# Altium PCB Main_Board_PCB.PcbDoc
Units mil, origin at the board's own origin, x right, y up, seen from the top; angles counter-clockwise.
Board outline 5374.86 x 3299.86 mil, 2 copper layers (Top Layer, Bottom Layer); 65 components, 53 nets, 281 pads, 171 vias.
Unrouted connection lines stored in the file: 52.
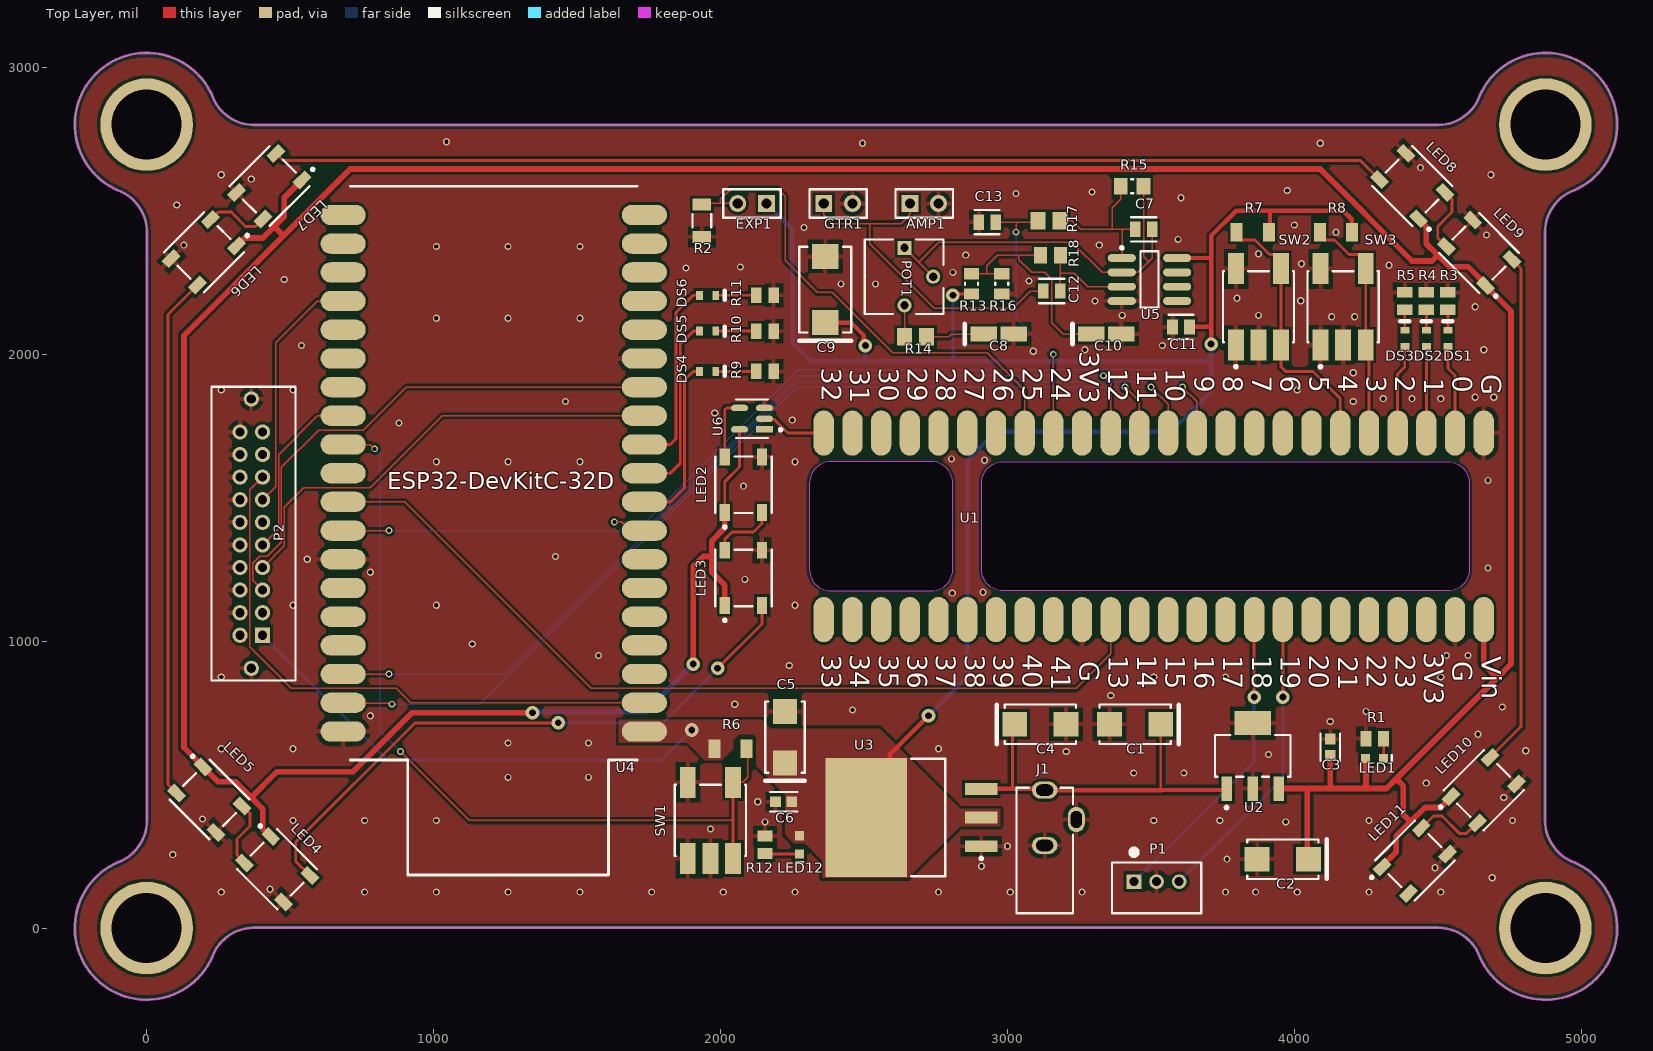
[diagram p0: Top Layer view]
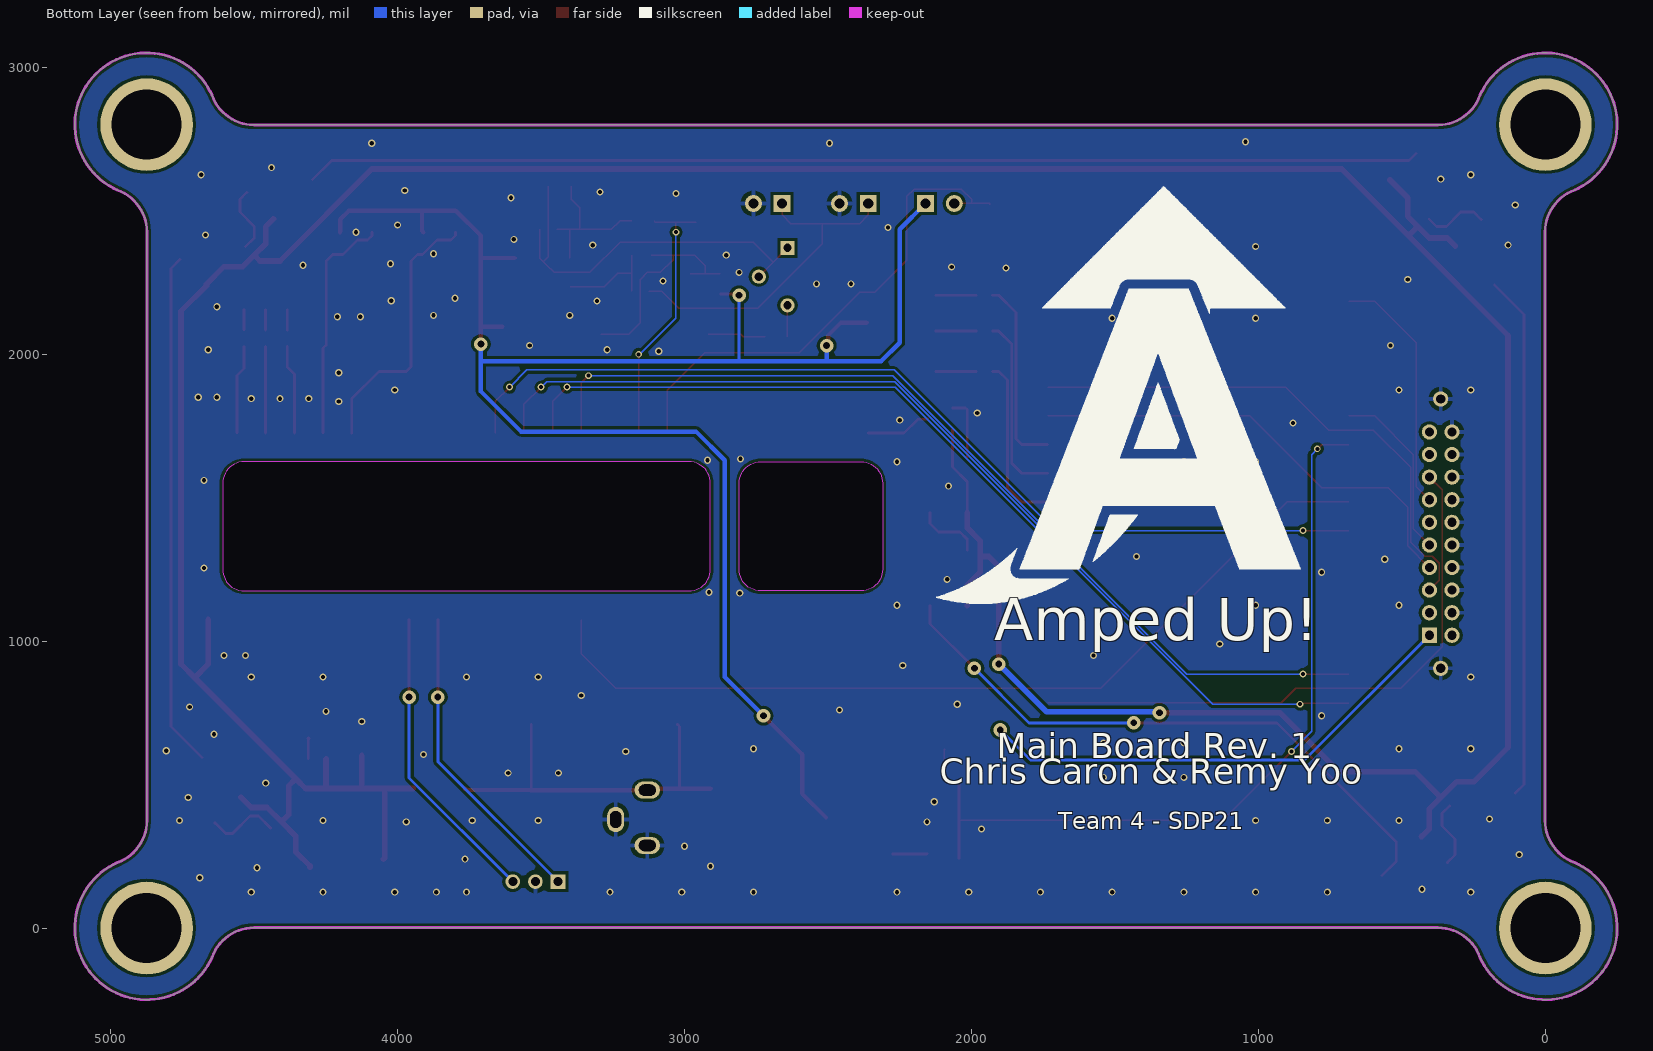
[diagram p1: Bottom Layer view, seen from below]
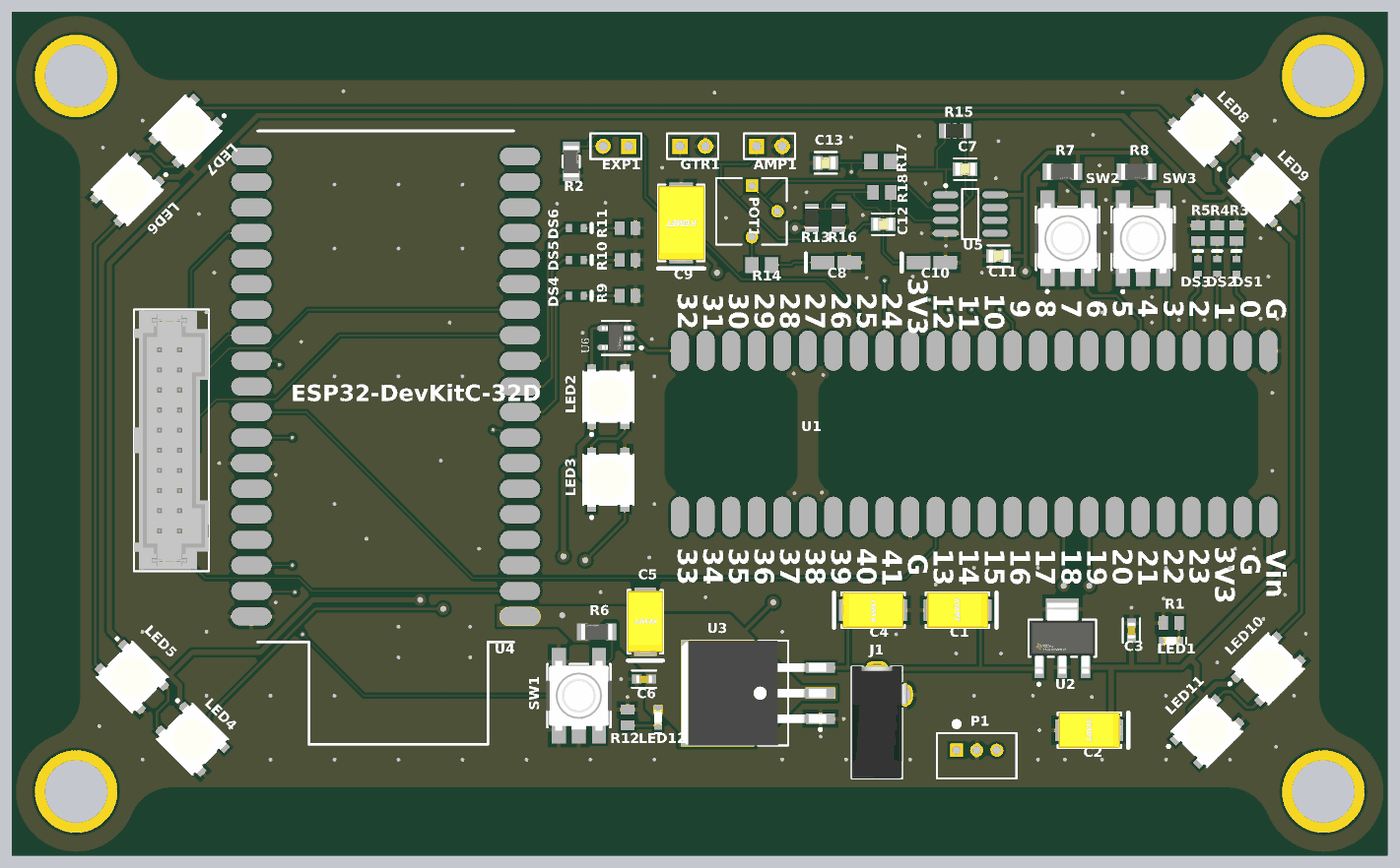
[diagram p2: 3D render of the assembled board from above, using the file's embedded part models]

## Layer stack, top to bottom
Top Solder: solder mask 0.4, Solder Resist, Dk 3.5
Top Layer: signal copper 1.4
Dielectric 1: dielectric 12.6, FR-4, Dk 4.8
Bottom Layer: signal copper 1.4
Bottom Solder: solder mask 0.4, Solder Resist, Dk 3.5

## Board outline
-101.53,228.45 ccw(c0,0) 228.45,-101.53 cw(c374.49,-154.04) 374.49,1.15 4500.51,1.15 cw(c4500.51,-154.04) 4646.55,-101.53 ccw(c4875,0) 4976.53,228.45 cw(c5029.04,374.49) 4873.85,374.49 4873.85,2425.51 cw(c5029.04,2425.51) 4976.53,2571.55 ccw(c4875,2800) 4646.55,2901.53 cw(c4500.51,2954.04) 4500.51,2798.85 374.49,2798.85 cw(c374.49,2954.04) 228.45,2901.53 ccw(c0,2800) -101.53,2571.55 cw(c-154.04,2425.51) 1.15,2425.51 1.15,374.49 cw(c-154.04,374.49)

## Design rules (kind name [scope] priority, off if disabled: settings)
Clearance [All] p1: gap=5 ignorepadtopadclearanceinfootprint=FALSE except(10: Arc-Fill Arc-Poly Arc-Region Track-Fill Track-Poly Track-Region SMDPad-Fill SMDPad-Poly SMDPad-Region THPad-Fill THPad-Poly THPad-Region Via-Fill Via-Poly Via-Region Fill-Fill Fill-Poly Fill-Region Poly-Poly Poly-Region Region-Region)
HoleSize [All] p1: absolutevalues=TRUE maxlimit=3937.01 minlimit=0.98 maxpercent=80.000 minpercent=20.000
MinimumSolderMaskSliver [All] p1: minsoldermaskwidth=7.87
PolygonConnect PolygonConnect_2 [InNet('3V3')] p1: connectstyle=Direct reliefconductorwidth=10 reliefentries=4 polygonreliefangle="90 Angle" airgapwidth=10
PolygonConnect PolygonConnect_1 [InNet('5V') OR InNet('GND')] p2: thpad.connectstyle=Relief thpad.reliefconductorwidth=15 thpad.reliefentries=4 thpad.polygonreliefangle="90 Angle" thpad.airgapwidth=15 smdpad.connectstyle=Relief smdpad.reliefconductorwidth=15 smdpad.reliefentries=4 smdpad.polygonreliefangle="90 Angle" smdpad.airgapwidth=15 via.connectstyle=Direct via.reliefconductorwidth=10 via.reliefentries=4 via.polygonreliefangle="90 Angle" via.airgapwidth=10
PolygonConnect [All] p3: connectstyle=Relief reliefconductorwidth=10 reliefentries=4 polygonreliefangle="90 Angle" airgapwidth=10
RoutingVias [All] p1: holewidth=13.78 width=23.62 viastyle="Through Hole" minholewidth=11.81 minwidth=23.62 maxholewidth=23.62 maxwidth=47.24
SilkToSolderMaskClearance [IsPad] p1: minsilkscreentomaskgap=5.91 clearancetoexposedcopper=TRUE
SolderMaskExpansion SolderMaskExpansion_1 [IsVia] p1: expansion=4 istentingtop=TRUE
SolderMaskExpansion [All] p2: expansion=1.97 istentingtop=FALSE
Width [All] p1: maxlimit=30 minlimit=5 preferedwidth=10 minimp=50.000000 maximp=50.000000 favimp=50.000000
27 further rules are at their usual default settings.

## Classes and differential pairs
component class Main_Board_Guitar_Buffer: AMP1 C7 C8 C9 C10 C11 C12 C13 GTR1 POT1 R13 R14 R15 R16 R17 R18 U5
component class Main_Board_Teensy: C1 C2 C3 LED1 P1 R1 U1 U2
component class Main_Board_IO: DS1 DS2 DS3 DS4 DS5 DS6 EXP1 J1 LED2 LED3 LED4 LED5 LED6 LED7 LED8 LED9 LED10 LED11 R2 R3 R4 R5 R6 R7 R8 R9 R10 R11 SW1 SW2 SW3 U6
component class Main_Board_ESP32: C4 C5 C6 LED12 P2 R12 U3 U4

## Components (designator, comment, footprint, x,y, rotation, side; value= is the part's Value field where it differs from the comment)
AMP1 "AMPLIFIER_INPUT" HDR1X2 2660,2525 r0 top
C1 "1uF" KEMT-T491-C_L 3445,710 r180 top
C2 "1uF" KEMT-T491-C_L 3960,240 r180 top
C3 "0.1uF" FP-GCM188-0_1-IPC_B 4125,630 r90 top
C4 "1uF" KEMT-T491-C_L 3115,710 r0 top
C5 "1uF" KEMT-T491-C_L 2225,665 r90 top
C6 "0.1uF" FP-GCM188-0_1-IPC_B 2220,440 r180 top
C7 "270pF" FP-C0805C-DN-MFG 3475,2435 r180 top value="270 pF"
C8 "10uF" KEMT-A-3216-18-2_M 2970,2070 r0 top
C9 "100 uF" KEMT-T491-D_L 2365,2225 r90 top
C10 "10uF" KEMT-A-3216-18-2_M 3345,2070 r0 top
C11 "100 nF" FP-C0805C-DN-MFG 3605,2095 r180 top value="0.10 μF"
C12 "100nF" FP-C0805C-DN-MFG 3154.53,2220 r0 top value="0.10 μF"
C13 "270pF" FP-C0805C-DN-MFG 2929.53,2460 r0 top value="270 pF"
DS1 "TLMS1000-GS08" VISH-TLMS1000_V 4535,2055 r90 top
DS2 "TLMS1000-GS08" VISH-TLMS1000_V 4460,2055 r90 top
DS3 "TLMS1000-GS08" VISH-TLMS1000_V 4385,2055 r90 top
DS4 "TLMY1000-GS08" VISH-TLMY1000_V 1955,1940 r0 top
DS5 "TLMY1000-GS08" VISH-TLMY1000_V 1955,2080 r0 top
DS6 "TLMY1000-GS08" VISH-TLMY1000_V 1955,2205 r0 top
EXP1 "EXP_SAMP" HDR1X2 2160,2525 r180 top
GTR1 "GUITAR_OUTPUT" HDR1X2 2360,2525 r0 top
J1 "694103303002" 694103303002 3130,270 r0 top
LED1 "Green" 0603_A 4280,590 r180 top
LED2 "1655" ADA-RGB-1655_V 2080,1545 r90 top
LED3 "1655" ADA-RGB-1655_V 2080,1220 r90 top
LED4 "1655" ADA-RGB-1655_V 455,205 r315 top
LED5 "1655" ADA-RGB-1655_V 219.14,447.73 r315 top
LED6 "1655" ADA-RGB-1655_V 200,2355 r225 top
LED7 "1655" ADA-RGB-1655_V 428.28,2585.36 r225 top
LED8 "1655" ADA-RGB-1655_V 4410.69,2586.02 r135 top
LED9 "1655" ADA-RGB-1655_V 4644.04,2352.68 r135 top
LED10 "1655" ADA-RGB-1655_V 4660,480 r45 top
LED11 "1655" ADA-RGB-1655_V 4420,235 r45 top
LED12 "Green" 0603_A 2275,290 r90 top
P1 "B3B-PH-K-S(LF)(SN)" JST-B3B-PH-K-S-3_V 3520,140 r0 top
P2 "T2M-110-01-L-D-TH-WT" SMTC-T2M-110-01-X-D-TH-WT 404.37,1020.16 r90 top
POT1 "100K" BOUR-3362P 2640,2270 r270 top
R1 "90" RESC2013X50X40LL20T20 4280,660 r0 top
R2 "10K" FP-CR1206-IPC_B 1935,2465 r90 top
R3 "750" RESC2013X50X40LL20T20 4535,2185 r270 top
R4 "750" RESC2013X50X40LL20T20 4460,2185 r270 top
R5 "750" RESC2013X50X40LL20T20 4385,2185 r270 top
R6 "10K" FP-CR1206-IPC_B 2035,625 r180 top
R7 "10K" FP-CR1206-IPC_B 3855,2425 r0 top
R8 "10K" FP-CR1206-IPC_B 4145,2425 r0 top
R9 "RR1220P-331-D" RESC2013X50X40LL20T20 2155,1940 r180 top
R10 "RR1220P-331-D" RESC2013X50X40LL20T20 2155,2080 r180 top
R11 "RR1220P-331-D" RESC2013X50X40LL20T20 2155,2205 r180 top
R12 "90" RESC2013X50X40LL20T20 2155,290 r270 top
R13 "10K" RESC2013X60X35NL10T20 2875,2245 r270 top
R14 "470" RESC2013X70X40ML20T20 2680,2060 r180 top
R15 "100K" RESC2013X60X35ML10T20 3435,2585 r180 top
R16 "10K" RESC2013X60X35NL10T20 2980,2245 r90 top
R17 "470" RESC2013X70X40ML20T20 3145,2465 r180 top
R18 "1M" RESC2013X70X40NL20T20 3150,2345 r0 top
SW1 "Momentary" FP-B3SN-3112P-MFG 1965,375 r270 top
SW2 "Momentary" FP-B3SN-3112P-MFG 3875,2165 r270 top
SW3 "Momentary" FP-B3SN-3112P-MFG 4170,2165 r270 top
U1 "Teensy 4.1 Socket" "Teensy 4.1 Socket" 4660,1700 r180 top locked
U2 "LM7805MPX/NOPB" FP-LM7805MPX-NOPB-MFG 3855,600 r90 top
U3 "3.3V Reg" KTT0003B_N 2665,385 r180 top
U4 "ESP32-DevKitC-32D" ESP32-DevKitC-32D 710,2485 r270 top locked
U5 "MCP6002" SOIC-SN8_M 3495,2260 r0 top locked
U6 "SN74LV1T34DBVR" FP-DBV0005A-IPC_B 2110,1775 r180 top

## Footprints (in the part's own frame and the unit in brackets; to place one, negate y for a bottom-side part, rotate by r counter-clockwise, add the part's x,y. Pads: shape width x height; smd on the part's side, far side on the other; paste and mask are expansions set on the pad)
0603_A [mm] "Chip LED, 2-Leads, Body 1.6x0.8mm, IPC Medium Density"
  rect 0.8x0.8 smd: 1(-0.8,0) 2(0.8,0)
  silkscreen extent -1.5,-0.3 -1.5,0.3, body extent -0.8,-0.4 0.8,0.4, height 0.7
694103303002 [mm] "DC Power Jack Right Angled(4.2)"
  oval 2.25x1.5 hole 1 slot 1.5 at 0 deg: 1(0,5.35) 2(0,0.45)
  oval 1.5x2.25 hole 1 slot 1.5 at 90 deg: 3(2.8,2.75)
  silkscreen extent -2.5,-5.55 2.5,5.55, body extent -2.5,-5.55 3,5.75, height 7.8
ADA-RGB-1655_V [mm] "SMD, 4-Leads, Body 5x5mm"
  rect 1.5x0.9 smd: 1(-2.45,1.65) 2(-2.45,-1.65) 3(2.45,-1.65) 4(2.45,1.65)
  silkscreen extent -3.87,-2.5 2.5,2.5, body extent -2.7,-2.5 2.7,2.5, height 1.68
BOUR-3362P [mm] "THD, 3-Leads, Body 6.6x6.99mm, Pitch 2.54mm"
  rect 1.25x1.25 hole 0.75: 1(-2.54,0.035)
  round 1.25 hole 0.75: 2(0,2.575) 3(2.54,0.035)
  silkscreen extent -3.3,-3.49 3.3,3.5, body extent -3.3,-3.49 3.3,3.49, height 4.95
ESP32-DevKitC-32D [mm]
  rrect100% 1.8x4 smd: 0(12.7,-0.635) 2(10.16,-0.635) 3V3(45.72,26.035) 4(15.24,-0.635) 5(22.86,-0.635) 5V(0,26.035) 12(15.24,26.035) 13(10.16,26.035) 14(17.78,26.035) 15(7.62,-0.635) 16(17.78,-0.635) 17(20.32,-0.635) 18(25.4,-0.635) 19(27.94,-0.635) 21(33.02,-0.635) 22(40.64,-0.635) 23(43.18,-0.635) 25(25.4,26.035) 26(22.86,26.035) 27(20.32,26.035) 32(30.48,26.035) 33(27.94,26.035) 34(35.56,26.035) 35(33.02,26.035) CLK(0,-0.635) CMD(2.54,26.035) D0(2.54,-0.635) D1(5.08,-0.635) D2(7.62,26.035) D3(5.08,26.035) EN(43.18,26.035) GND-1(30.48,-0.635) GND-2(45.72,-0.635) GND-3(12.7,26.035) RX(35.56,-0.635) TX(38.1,-0.635) VN(38.1,26.035) VP(40.64,26.035)
  silkscreen extent -2.54,0 58.42,25.4
FP-B3SN-3112P-MFG [mm]
  rect 2.75x1.4 smd paste+0 mask+0: 1(3.375,-2) 2(-3.375,-2) 3(3.375,2) 4(-3.375,2) 5(3.375,0)
  silkscreen extent -3.15,-3.15 3.15,3.15, body extent -4.85,-3.25 4.85,3.25, height 0.25
FP-C0805C-DN-MFG [mm]
  rect 0.95x1.35 smd paste+0 mask+0: 1(-0.75,0) 2(0.75,0)
  silkscreen extent -1.1,-1.07 1.1,1.07, body extent -1.4,-0.85 1.4,0.85, height 0.25
FP-CR1206-IPC_B [mil]
  rect 41.66x65.44 smd paste+0 mask+0: 1(-56.18,0) 2(56.18,0)
  silkscreen extent -24,-33 24,33, body extent -87,-43 87,43, height 10
FP-DBV0005A-IPC_B [mm]
  rect 1.505x0.572 smd paste+0 mask+0: 1(-1.1,0.95)
  rrect100% 1.505x0.572 smd paste+0 mask+0: 2(-1.1,0) 3(-1.1,-0.95) 4(1.1,-0.95) 5(1.1,0.95)
  silkscreen extent -2.65,-1.7 1.4,1.7, body extent -2.1,-1.7 2.1,1.7, height 0.25
FP-GCM188-0_1-IPC_B [mil]
  rect 37.74x35.91 smd paste+0 mask+0: 1(-28.61,0) 2(28.61,0)
  silkscreen extent -47,-34 47,34, body extent -57,-28 57,28, height 10
FP-LM7805MPX-NOPB-MFG [mm]
  rect 2.15x0.95 smd paste+0 mask+0: 1(-2.9,2.3) 2(-2.9,0) 3(-2.9,-2.3)
  rect 2.15x3.25 smd paste+0 mask+0: 4(2.9,0)
  silkscreen extent -4.7,-3.35 1.85,3.35, body extent -4.08,-3.45 4.08,3.45, height 0.25
HDR1X2 [mm] "Connector; Header; 2 Position"
  rect 1.5x1.5 hole 0.9: 1(0,0)
  round 1.5 hole 0.9: 2(2.54,0)
  silkscreen extent -1.27,-1.27 3.81,1.27
JST-B3B-PH-K-S-3_V [mm] "Connector, 3-Leads, Body 7.9x4.5mm, Pitch 2mm"
  rect 1.3x1.3 hole 0.8: 1(-2,0.55)
  round 1.3 hole 0.8: 2(0,0.55) 3(2,0.55)
  silkscreen extent -3.95,-2.25 3.95,3.4, body extent -3.95,-2.25 3.95,2.25, height 6
KEMT-A-3216-18-2_M [mm] "Molded TAN Capacitor, 2-Leads, Body 3.4x1.8mm, IPC Low Density"
  rect 2.35x1.35 smd: 1(-1.325,0) 2(1.325,0)
  silkscreen extent -3,-0.9 -3,0.9, body extent -1.7,-0.9 1.7,0.9, height 1.8
KEMT-T491-C_L [mm] "Molded Capacitor, 2-Leads, Body 6.30x3.50mm, IPC High Density"
  rect 2.2x2.15 smd: 1(-2.275,0) 2(2.275,0)
  silkscreen extent -3.87,-1.75 3.15,1.75, body extent -3.15,-1.75 3.15,1.75, height 2.79
KEMT-T491-D_L [mm] "Molded Capacitor, 2-Leads, Body 7.60x4.60mm, IPC High Density"
  rect 2.2x2.35 smd: 1(-2.925,0) 2(2.925,0)
  silkscreen extent -4.52,-2.3 3.8,2.3, body extent -3.8,-2.3 3.8,2.3, height 3.1
KTT0003B_N [mm] "D2-PAK, 3-Leads, Body 10.41x8.89mm, Pitch 2.54mm, IPC Medium Density"
  rect 2.85x1.05 smd: 1(-6.2,2.54) 2(-6.2,0) 3(-6.2,-2.54)
  rect 7.2x10.5 smd: 4(4,0)
  silkscreen extent -6.33,-5.2 0,5.2, body extent -6.78,-5.2 7.57,5.2, height 4.64
RESC2013X50X40LL20T20 [mm] "Chip Resistor, 2-Leads, Body 2.00x1.25mm, IPC High Density"
  rect 0.95x1.35 smd: 1(-0.775,0) 2(0.775,0)
  body extent -1.1,-0.72 1.1,0.73, height 0.5
RESC2013X60X35ML10T20 [mm] "Chip Resistor, 2-Leads, Body 2.1x1.35mm, IPC Low Density"
  rect 1.2x1.45 smd: 1(-1,0) 2(1,0)
  silkscreen extent -0.1,-0.63 0.1,0.63, body extent -1.05,-0.68 1.05,0.67, height 0.6
RESC2013X60X35NL10T20 [mm] "Chip Resistor, 2-Leads, Body 2.1x1.35mm, IPC Medium Density"
  rect 1x1.35 smd: 1(-0.9,0) 2(0.9,0)
  silkscreen extent -0.1,-0.58 0.1,0.58, body extent -1.05,-0.68 1.05,0.67, height 0.6
RESC2013X70X40ML20T20 [mm] "Chip Resistor, 2-Leads, Body 2.00x1.25mm, IPC Low Density"
  rect 1.35x1.55 smd: 1(-0.975,0) 2(0.975,0)
  body extent -1.1,-0.72 1.1,0.72, height 0.7
RESC2013X70X40NL20T20 [mm] "Chip Resistor, 2-Leads, Body 2.2x1.35mm, IPC Medium Density"
  rect 1.15x1.45 smd: 1(-0.875,0) 2(0.875,0)
  body extent -1.1,-0.72 1.1,0.72, height 0.7
SMTC-T2M-110-01-X-D-TH-WT [mm] "Shrouded Terminal Strip, 2x10 Pins, Vertical, 2mm Pitch, Male"
  rect 1.35x1.35 hole 0.813: 1(0,0)
  round 1.35 hole 0.813: 2(0,2) 3(2,0) 4(2,2) 5(4,0) 6(4,2) 7(6,0) 8(6,2) 9(8,0) 10(8,2) 11(10,0) 12(10,2) 13(12,0) 14(12,2) 15(14,0) 16(14,2) 17(16,0) 18(16,2) 19(18,0) 20(18,2) MH1(-2.925,1) MH2(20.925,1)
  silkscreen extent -4,-2.92 22,4.52, body extent -3.84,-2.91 21.84,4.52, height 5.79
SOIC-SN8_M [mm] "SOIC, 8-Leads, Body 4.9x3.9mm, Pitch 1.27mm, IPC Low Density"
  oval 2.5x0.7 smd: 1(-2.45,1.905) 2(-2.45,0.635) 3(-2.45,-0.635) 4(-2.45,-1.905) 5(2.45,-1.905) 6(2.45,-0.635) 7(2.45,0.635) 8(2.45,1.905)
  silkscreen extent -2.57,-2.5 0.8,2.93, body extent -2,-2.5 2,2.5, height 1.75
"Teensy 4.1 Socket" [mm]
  rrect100% 1.8x4 smd: 0(2.54,-0.635) 1(5.08,-0.635) 2(7.62,-0.635) 3(10.16,-0.635) 3.3-1(35.56,-0.635) 3.3-2(5.08,15.875) 4(12.7,-0.635) 5(15.24,-0.635) 6(17.78,-0.635) 7(20.32,-0.635) 8(22.86,-0.635) 9(25.4,-0.635) 10(27.94,-0.635) 11(30.48,-0.635) 12(33.02,-0.635) 13(33.02,15.875) 14(30.48,15.875) 15(27.94,15.875) 16(25.4,15.875) 17(22.86,15.875) 18(20.32,15.875) 19(17.78,15.875) 20(15.24,15.875) 21(12.7,15.875) 22(10.16,15.875) 23(7.62,15.875) 24(38.1,-0.635) 25(40.64,-0.635) 26(43.18,-0.635) 27(45.72,-0.635) 28(48.26,-0.635) 29(50.8,-0.635) 30(53.34,-0.635) 31(55.88,-0.635) 32(58.42,-0.635) 33(58.42,15.875) 34(55.88,15.875) 35(53.34,15.875) 36(50.8,15.875) 37(48.26,15.875) 38(45.72,15.875) 39(43.18,15.875) 40(40.64,15.875) 41(38.1,15.875) GND1(0,-0.635) GND2(35.56,15.875) GND3(2.54,15.875) Vin(0,15.875)
  Keep-Out Layer board cut-out: 1.27,3.81 1.27,11.43 1.415,12.159 1.828,12.777 2.446,13.19 3.175,13.335 3.175,13.335 42.545,13.335 43.274,13.19 43.892,12.777 44.305,12.159 44.45,11.43 44.45,11.43 44.45,3.81 44.305,3.081 43.892,2.463 43.274,2.05 42.545,1.905 42.545,1.905 3.175,1.905 2.222,2.16 1.525,2.857 1.27,3.81
  Keep-Out Layer board cut-out: 46.99,3.81 47.135,3.081 47.548,2.463 48.166,2.05 48.895,1.905 48.895,1.905 57.785,1.905 58.514,2.05 59.132,2.463 59.545,3.081 59.69,3.81 59.69,3.81 59.69,11.43 59.545,12.159 59.132,12.777 58.514,13.19 57.785,13.335 57.785,13.335 48.895,13.335 48.166,13.19 47.548,12.777 47.135,12.159 46.99,11.43 46.99,11.43
VISH-TLMS1000_V [mm] "SMD, 2-Leads, Body 0.8x1.6mm"
  rect 0.6x0.8 smd: 1(-0.725,0) 2(0.725,0)
  silkscreen extent 1.52,-0.4 1.52,0.4, body extent -0.8,-0.4 0.8,0.4, height 0.65
VISH-TLMY1000_V [mm] "SMD, 2-Leads, Body 1.6x0.8mm"
  rect 0.6x0.8 smd: 1(-0.725,0) 2(0.725,0)
  silkscreen extent 1.53,-0.4 1.53,0.4, body extent -0.8,-0.4 0.8,0.4, height 0.65

## Part data
AMP1 EXP1 GTR1: library part "Header 2", "Header, 2-Pin", LatestRevisionDate=17-Jul-2002, LatestRevisionNote="Re-released for DXP Platform.", Publisher="Altium Limited"
C1 C2 C4 C5: library part CMP-2000-07195-1, "Tantalum Capacitor, 1 uF, +/- 10%, 50 V, -55 to 125 degC, 2-Pin SMD, RoHS, Tape and Reel", Capacitance=1000000pF, Case Code=C, Case Style=Molded, Manufacturer=Kemet, Operating Temp Range=-55Cto125C, Package / Case=6032-28, Package Description="2-Pin Surface Mount Device, Body 6 x 3.2 mm", Package Reference=T491-C, Tolerance (+ or -)=10%, Voltage=50VDC, Construction=SMTChip, Datasheet URL=http://capacitoredge.kemet.com/capedge2/DataSheet/Datasheet-T491C105K050AT.pdf?pn=T491C105K050AT, Datasheet Version=10/2016, DCL=0.5uA, DF=4%, ESR=5.5ohm, Failure Rate=NotRequired, Insulation=NotRequired, Lead Spacing (nom)=NotRequiredmm, Length W/Weld=NotRequiredmm, Length W/Weld (max)=NotRequiredmm, Manufacturer URL=http://www.kemet.com/, Mounting Style=SurfaceMount, Mounting Technology=SurfaceMount, Packaging=TapeandReel, Polarity=Polar, Product Depth (mm)=3.2mm, Product Diameter (mm)=NotRequiredmm, Product Height (mm)=2.5mm, Product Length (mm)=6mm, Rad Hardened=No, Seal=NotRequired, Seated Plane Height=NotRequiredmm, Wire Form=NotRequired
C3 C6: library part CMP-2006-02353-3, "Ceramic Capacitor for Automotive 100nF  ±10% 50VDC X8L 0603 Paper T/R", Capacitance=100nF, Case Code (Imperial)=0603, Case Code (Metric)=1608, Dielectric=X8L, Max Operating Temperature=150°C, Min Operating Temperature=-55°C, Package Quantity=4000, Ratings=AEC-Q200, Tolerance=10%, Voltage=50V, Case/Package=0603, Depth=0.8mm, Height=0.8mm, Lead Free="Lead Free", Length=1.6mm, Mount="Surface Mount", Packaging="Tape and Reel", Radiation Hardening=No, Termination=SMD/SMT, Thickness=0.035inch, Voltage Rating=50V, Voltage Rating (DC)=50V, Width=0.5mm
C7 C13: library part CMP-1036-02406-3, "CAP CER 270PF 50V C0G/NP0 0805", Capacitance="270 pF", Manufacturer=KEMET, Manufacturer Part Number=C0805C271J5GACTU, Package=C0805C-DN, Temperature="-55°C to +125°C", Temperature Characteristic=C0G, Temperature Coefficient=30ppm/°C, Temperature Range High=+125°C, Temperature Range Low=-55°C, Tolerance=0.05, Voltage Rating="50 V", Automotive=No, Category=Cap, ComponentLink2Description=Datasheet, ComponentLink2URL=https://content.kemet.com/datasheets/KEM_C1003_C0G_SMD.pdf, Device Class L1="Passive Components", Device Class L2=Capacitors, Device Class L3="Ceramic Capacitors", Digikey Description="CAP CER 270PF 50V C0G/NP0 0805", Height=0.88mm, Ipc Land Pattern Name=CAPC200125X78, Lead Free=Yes, Material=Ceramic, Mouser Description="Multilayer Ceramic Capacitors MLCC - SMD/SMT 50volts 270pF C0G 5%", Octopart=https://octopart.com/c0805c271j5gactu-kemet-104903, RoHS=TRUE
C8 C10: library part CMP-2000-05172-1, "Capacitor, Tantalum, 10 uF, +/- 10%, 10 V, -55 to 125 degC, 2-Pin SMD (1206), RoHS, Tape and Reel", Capacitance=10µF, ESR (Equivalent Series Resistance)=3.8Ohm, Lifetime @ Temp.=2000Hrs@85degC, Manufacturer=Kemet, Manufacturer Size Code=A, Operating Temperature=-55degC~125degC, Package / Case=1206(3216Metric), Package Description="2-Pin Surface Mount Device, Body 3.2 x 1.6 mm", Package Reference=1206, Standard Package=2,000, Tolerance=±10%, Voltage - Rated=10V, Catalog Drawings=T49x,T5xxSeries_A-side1T49x,T5xxSeries_A,B-side2T49x,T5xxSeries_A,SBottom, Category=Capacitors, Datasheet URL=http://www.farnell.com/datasheets/1824869.pdf, Datasheet Version=Apr-14, Family=TantalumCapacitors, Features=GeneralPurpose, Height - Seated (Max)="0.071\"(1.80mm)", Lead Spacing=-, Manufacturer URL=http://www.kemet.com/, Mounting Type=SurfaceMount, Online Catalog=T491Series, Other Names=399-3684-2, Packaging=Tape&Reel(TR), Product Training Modules=CapacitorBasics-TypicalUsesforCapacitorsDeratingGuidelinesforSurfaceMountTantalumCapacitors, Series=T491, Size / Dimension="0.126\"Lx0.063\"W(3.20mmx1.60mm)", Type=Molded
C9: library part CMP-2000-07541-1, "Tantalum Surface Mount Capacitor, 100 uF, +/- 10%, 16 V, -55 to 125 degC, 2917 (7343 Metric), RoHS, Tape and Reel", Capacitance=100uF, Case Code (Imperial)=2917, Case Code (Metric)=7343, Case\/Package=Molded, Dielectric Material=Tantalum, ESR (Equivalent Series Resistance)=700mOhm, Leakage Current=16uA, Manufacturer=Kemet, Max Operating Temperature=125degC, Min Operating Temperature=-55degC, Package Description="2-Pin Surface Mount Device, Body 7.3 x 4.3 mm", Package Quantity=1, Package Reference=T491-D, Ripple Current=463mA, Tolerance=10%, Voltage=16V, Datasheet URL=http://www.kemet.com/Lists/ProductCatalog/Attachments/254/KEM_T2005_T491.pdf, Datasheet Version=07/2017, Depth=4.3mm, Dissipation Factor=8%, Height=2.8mm, Height - Seated (Max)=0.122inch, Lead Free=LeadFree, Lead Pitch=3.6mm, Length=7.3mm, Life (Hours)=2000Hour, Manufacturer URL=http://www.kemet.com/, Mount=PCB, Mounting Technology=SurfaceMount, Packaging=TapeandReel, Polarity=Polar, Radiation Hardening=No, REACH SVHC=NoSVHC, RoHSCompliant=true, Termination=SMD/SMT, Voltage Rating=16V, Voltage Rating (DC)=16V, Weight=0.023634oz, Width=4.3mm
C11 C12: library part CMP-2007-00279-2, "CAP CER 0.1UF 50V X7R 0805", Capacitance="0.10 μF", Manufacturer=KEMET, Manufacturer Part Number=C0805C104K5RACTU, Package=C0805C-DN, Temperature="-55°C to +125°C", Temperature Characteristic=X7R, Temperature Coefficient=30ppm/°C, Temperature Range High=+125°C, Temperature Range Low=-55°C, Tolerance=0.1, Voltage Rating="50 V", Automotive=No, Category=Cap, ComponentLink2Description=Datasheet, ComponentLink2URL=https://content.kemet.com/datasheets/KEM_C1003_C0G_SMD.pdf, Device Class L1="Passive Components", Device Class L2=Capacitors, Device Class L3="Ceramic Capacitors", Digikey Description="CAP CER 0.1UF 50V X7R 0805", Height=0.88mm, Ipc Land Pattern Name=CAPC200125X78, Lead Free=Yes, Material=Ceramic, Mouser Description="Cap Ceramic 0.1uF 50V X7R 10% SMD 2.0 x 1.2 mm 125 C Paper T/R", Octopart=https://octopart.com/c0805c104k5ractu-kemet-143926, RoHS=TRUE
DS1 DS2 DS3: library part CMP-2000-07254-1, "Low Current LED, 40 mW, 1.8 V, -40 to 100 degC, 2-Pin SMD (0603), RoHS, Tape and Reel", Forward Current If=2mA, Forward Voltage=1.8V, LED Colour=Red, Manufacturer=Vishay, Package Description="2-Pin Surface Mount Device, Body 1.6 x 0.8 mm", Package Reference=TLMS1000, Automotive Qualification Standard=AEC-Q100, Bulb Size=1.6mmx0.8mm, Datasheet URL=https://datasheet.ciiva.com/5798/1698881-5798337.pdf, Datasheet Version="Rev. 1.7, 02/2011", LED Mounting=SMD, Lens Shape=Rectangular, Luminous Intensity=4mcd, Manufacturer URL=http://www.vishay.com/, Mounting Technology=SurfaceMount, MSL=MSL2-1year, Packaging=CutTape, Product Range=-, SVHC=ToBeAdvised, Viewing Angle=80°, Wavelength Typ=636nm
DS4 DS5 DS6: library part CMP-2000-07255-1, "Low Current LED, 40 mW, -40 to 100 degC, 2-Pin SMD, RoHS, Tape and Reel", Forward Current If=2mA, Forward Voltage=1.8V, LED Colour=Yellow, Manufacturer=Vishay, Package Description="2-Pin Surface Mount Device, Body 1.6 x 0.8 mm", Package Reference=TLMY1000, Automotive Qualification Standard=AEC-Q100, Bulb Size=1.6mmx0.8mm, Datasheet URL=http://www.vishay.com/docs/83172/tlmo1000.pdf, Datasheet Version="Rev. 2.0, 09/2013", LED Mounting=SMD, Lens Shape=Rectangular, Luminous Intensity=7.5mcd, Manufacturer URL=http://www.vishay.com/, Mounting Technology=SurfaceMount, MSL=MSL2-1year, Packaging=CutTape, Product Range=-, SVHC=ToBeAdvised, Viewing Angle=80°, Wavelength Typ=595nm
J1: library part CMP-1502-00185-1, "DC Power Jack Connector WR-DC, Male, Right Angled, THT, 2 A, 30 V", Manufacturer="Wurth Elektronik", Operating Temperature=-40to85degC, Rated Current=2A, Working Voltage=30V, Datasheet URL=http://katalog.we-online.de/em/datasheet/6941xx303002.pdf, Gender=Male, Manufacturer URL=http://www.we-online.de, Mounting Technology=THT, Opening Diameter=4.2mm, Orientation=RightAngled, Package Reference=694103303002, Packaging=Bag, Part Number=694103303002, Plug Inner Diameter=1.35mm, Plug Outer Diameter=3.5mm, Publisher=WurthElektronik
LED1 LED12: library part CMP-1426-00002-1, "SMD mono-color Chip LED, WL-SMCW, Green", Manufacturer="Wuerth Elektronik", PartNumber=150060GS75000, Color=Green, ComponentLink1Description="Manufacturer URL", ComponentLink1URL=http://www.we-online.com, ComponentLink2Description=Datasheet, ComponentLink2URL=http://katalog.we-online.com/led/datasheet/150060GS75000.pdf, PackageReference=0603_A
LED2 LED3 LED4 LED5 LED6 LED7 LED8 LED9 LED10 LED11: library part CMP-2000-05026-1, "Intelligent Control LED Integrated Light Source, 3.5 to 5.3 V, -25 to 80 degC, 4-Pin SMD, RoHS, Tape and Reel", Color=Red,Green,Blue(RGB), Manufacturer=Adafruit-Industries-LLC, Package Description="4-Pin Surface Mount Device, Body 5 x 5 mm", Category=Optoelectronics, Configuration=Discrete, Controller Type=-, Datasheet URL=http://datasheet.octopart.com/ADA1655-Adafruit-Industries-datasheet-32028139.pdf, Datasheet Version=May-13, Family=Addressable,Specialty, Interface=-, Manufacturer URL=https://www.adafruit.com/, Mounting Type=SurfaceMount, Number of LEDs=10, Package Reference=1655, Series=Neopixel, Size / Dimension=5.00mmLx5.00mmW, Utilized LED=WS2812(5050)
P1: library part CMP-2000-05164-1, "Male Header, Pitch 2 mm, 1 x 3 Position, Height 6 mm, Tail Length 3.4 mm, -25 to 85 degC, RoHS, Bulk", Manufacturer=JST, Datasheet URL=https://datasheet.ciiva.com/11746/0900766b80826550-11746939.pdf, Datasheet Version=Oct-06, Manufacturer URL=http://www.jst.com/home2.html, No of Positions=3, Pitch=2mm, Style/Orientation=StraightHeader/Plug, Termination=Crimp, Type=ShroudedHeader
P2: library part CMP-1029-00094-1, "High Reliability Cable Header, Through-hole, Vertical, -55 to 125 degC, 2 mm Pitch, 20-Pin, Male, RoHS", Manufacturer=Samtec, Temperature Range="-55 to 125 degC", ComponentLink1Description="Manufacturer URL", ComponentLink1URL=http://www.samtec.com, ComponentLink2Description=Datasheet, ComponentLink2URL=http://d2a072wq521u33.cloudfront.net/catalog_english//t2m.pdf, ComponentLink3Description="Package Specification", ComponentLink3URL=http://www.samtec.com/documents/webfiles/cpdf/T2M-1XX-XX-X-D-XX-XX-MKT.pdf, DatasheetVersion=F-214, Mounting Technology=Through-hole, Orientation=Vertical, PackageDescription="2mm Shrouded Terminal Strip", PackageReference=T2M-110-01-X-D-TH-WT, PackageVersion="V, 3/2009", PartNumber=T2M-110-01-L-D-TH-WT, Pitch="2 mm", RoHS=True
POT1: library part CMP-1747-00003-1, "Square Trimpot(R) Trimming Potentiometer, 100 KOhm, 300 V, -55 to 125 degC, 3-Pin THD, RoHS, Tube", Case\Package=Axial, Max Operating Temperature="155 degC", Min Operating Temperature="-55 degC", Package Quantity=200, Power Rating="250 mW", Resistance="1 mohm", Tolerance=1%, Voltage Rating="250 V", ComponentLink1Description="Manufacturer URL", ComponentLink1URL=http://www.bourns.com/, ComponentLink2Description=Datasheet, ComponentLink2URL=http://www.bourns.com/docs/Product-Datasheets/3362.pdf, DatasheetVersion=May-16, Length="0.248 inch", Mount="Through Hole", PackageDescription="3-Pin Through Hole Device, Body 6.6 x 6.99 mm, Pitch 2.54 mm", PackageReference=3326P, Packaging=Bulk, RoHSCompliant=true
R1 R3 R4 R5 R12: library part CMP-2001-03378-1, Manufacturer=Susumu, Part Number=RR1220P-331-D
R2 R6 R7 R8: library part CMP-07231-005593-1, "Thick Film Chip Resistors 1206 10kΩ 0.25W 5% 200ppm/°C", Case Code (Imperial)=1206, Case Code (Metric)=3216, Max Operating Temperature=155°C, Max Power Dissipation=250mW, Min Operating Temperature=-55°C, Package Quantity=1, Resistance=10kR, Temperature Coefficient=200ppm/°C, Tolerance=5%, Voltage Rating=200V, Case/Package=1206, Composition="Thick Film", Contact Plating=Tin, Depth=1.6mm, Features="Moisture Resistant", Height=0.6mm, Length=3.2mm, Military Standard=Not, Mount="Surface Mount", Number of Pins=2, Number of Terminations=2, Packaging="Tape and Reel", Power Rating=250mW, Radiation Hardening=No, REACH SVHC="No SVHC", Termination=SMD/SMT, Thickness=610um, Voltage Rating (DC)=200V, Width=1.6mm
R9 R10 R11: library part CMP-2001-03378-1, Manufacturer=Susumu, Part Number=RR1220P-331-D
R13 R16: library part CMP-1659-00013-4, "Chip Resistor, 10 KOhm, +/- 1%, 0.125 W, -55 to 155 degC, 0805 (2012 Metric), RoHS, Tape and Reel", Manufacturer=Yageo, Max Operating Temperature="155 degC", Min Operating Temperature="-55 degC", Package Quantity=5000, Voltage Rating="150 V", ComponentLink1Description="Manufacturer URL", ComponentLink1URL=http://www.yageo.com/, ComponentLink2Description=Datasheet, ComponentLink2URL=http://www.yageo.com/documents/recent/PYu-RC_Group_51_RoHS_L_04.pdf, DatasheetVersion="Rev. 4, 02/2016", Height="0.5 mm", Length="2 mm", Mount="Surface Mount", Mounting Technology="Surface Mount", PackageDescription="2-Pin Surface Mounted Device, Body 2 x 1.25 mm", PackageReference=0805, Packaging="Tape and Reel", Pins=2, REACH SVHC="No SVHC", RoHSCompliant=true
R14 R17: library part CMP-2001-00549-5, "Chip Resistor, 470 Ohm, +/- 1%, 0.125 W, -55 to 155 degC, 0805 (2012 Metric), RoHS, Tape and Reel", Manufacturer=Panasonic, Max Operating Temperature="155 degC", Min Operating Temperature="-55 degC", Package Quantity=1, Voltage Rating="150 V", ComponentLink1Description="Manufacturer URL", ComponentLink1URL=http://www.panasonic.com/, ComponentLink2Description=Datasheet, ComponentLink2URL=http://industrial.panasonic.com/cdbs/www-data/pdf/RDA0000/AOA0000C86.pdf, DatasheetVersion=04/2015, Height="0.6 mm", Length="2 mm", Mount="Surface Mount", Mounting Technology="Surface Mount", PackageDescription="2-Pin Surface Mount Device, Body 2 x 1.25 mm", PackageReference=0805, Packaging="Cut Tape", Pins=2, REACH SVHC=Yes, RoHSCompliant=true
R15: library part CMP-2100-03668-1, "Chip Resistor, 100 KOhm, +/- 1%, 0.125 W, -55 to 155 degC, 0805 (2012 Metric), RoHS, Tape and Reel", Case Code (Imperial)=0805, Case Code (Metric)=2012, Manufacturer=Yageo, Max Operating Temperature=155degC, Max Power Dissipation=125mW, Min Operating Temperature=-55degC, Package Description="2-Pin Surface Mounted Device, Body 2 x 1.25 mm", Package Quantity=1, Resistance=100KOhm, Temperature Coefficient=100ppm/degreesC, Tolerance=1%, Voltage Rating=150V, Case/Package=0805, Composition=ThickFilm, Datasheet URL=http://www.yageo.com/NewPortal/yageodocoutput?fileName=/pdf/R-Chip/PYu-RC_Group_51_RoHS_L_5.pdf, Datasheet Version="Rev. 5, 10/2016", Depth=1.25mm, Height=0.024inch, Lead Free=LeadFree, Lead Pitch=0.4mm, Length=2mm, Manufacturer URL=http://www.yageo.com/, Military Standard=Not, Number of Pins=2, Number of Terminations=2, Package Reference=0805, Packaging=TapeandReel, Power Rating=125mW, REACH SVHC=Unknown, RoHSCompliant=true, Termination=SMD/SMT, Voltage Rating (DC)=150V, Width=0.049inch
R18: library part CMP-2001-04378-5, "Chip Resistor, 1000 KOhm, +/- 1%, 0.125 W, -55 to 155 degC, 0805 (2012 Metric), RoHS, Tape and Reel", Manufacturer=Panasonic, Max Operating Temperature="155 degC", Min Operating Temperature="-55 degC", Package Quantity=5000, Voltage Rating="150 V", ComponentLink1Description="Manufacturer URL", ComponentLink1URL=http://www.panasonic.com/, ComponentLink2Description=Datasheet, ComponentLink2URL=http://industrial.panasonic.com/cdbs/www-data/pdf/RDA0000/AOA0000C86.pdf, DatasheetVersion=04/2015, Height="0.6 mm", Length="2 mm", Mount="Surface Mount", Mounting Technology="Surface Mount", PackageDescription="2-Pin Surface Mount Device, Body 2 x 1.25 mm", PackageReference=0805, Packaging="Tape and Reel", Pins=2, REACH SVHC=Yes, RoHSCompliant=true
SW1 SW2 SW3: library part CMP-08834-000011-1, "SWITCH TACTILE SPST-NO 0.05A 24V", Case/Package=SMD/SMT, Contact Current Rating=50mA, Contact Resistance=100mR, Max Operating Temperature=70°C, Max Voltage Rating (DC)=24V, Min Operating Temperature=-20°C, Operating Force=1.57N, Package Quantity=1, Ratings=IP67, Actuator Type=Standard, Contact Material=Gold, Contact Plating=Silver, Current Rating=50mA, Depth=7mm, Electrical Life=50000Cycles, Illumination Type=Non-Illuminated, Lead Free="Lead Free", Length=6.5mm, Max Current Rating=50mA, Mechanical Life=50000Cycles, Mount="Surface Mount", Number of Poles=1, Orientation=Straight, Packaging="Tape and Reel", Radiation Hardening=No, Switch Function=Off-Mom, Switch Travel=0.25mm, Termination=SMD/SMT, Throw Configuration=SPST, Voltage Rating (DC)=24V, Weight=0.007055oz
U1: "Teensy 4.1"
U2: library part CMP-04917-000022-1, "IC REG LINEAR 5V 1.5A SOT223-4", Dropout Voltage=2V, Manufacturer="Texas Instruments", Max Junction Temp=+150°C, Max Supply Voltage=30V, Min Supply Voltage=7.5V, Nominal Supply Current=8mA, Output Current=1.5A, Output Voltage=5V, Package=SOT223-4, Temperature="0°C to +125°C", Temperature Range High=+125°C, Temperature Range Low=0°C, Accuracy Percentage=3%, Automotive=No, Category=IC, ComponentLink2Description=Datasheet, ComponentLink2URL=http://www.ti.com/lit/ds/symlink/lm7800.pdf, Device Class L1="Integrated Circuits (ICs)", Device Class L2="Power Management ICs", Device Class L3="Voltage Regulators - Linear", Digikey Description="IC REG LINEAR 5V 1.5A SOT223-4", Height=1.8mm, Lead Free=Yes, Manufacturer Part Number=LM7805MPX/NOPB, Number Of Outputs=1, Octopart=https://octopart.com/lm7805mpx%2Fnopb-texas+instruments-74629992, Output Type=Fixed, RoHS=TRUE, Standoff Height=0.02mm
U3: library part CMP-0062-00678-5, "800mA Low-Dropout Linear Regulator, 3-pin TO-263, Pb-Free", Manufacturer="Texas Instruments", PackageTopMarking=NSUZXYTTE#*LM1117S*3.3, PartNumber=LM1117SX-3.3/NOPB, PowerWise=N, Code_JEDEC=MO-169-AA, ComponentLink1Description="Datasheet URL", ComponentLink1URL=http://www.ti.com/general/docs/lit/getliterature.tsp?genericPartNumber=LM1117&fileType=pdf, CompType="LDO IC", High-Reliability=Y, PackageDescription="TO-263, Molded, .400 x .390 x .180in, 3 Lead, .1in Pitch, Surface Mount", PackageReference=KTT0003B, PinCount=3, RoHS=Y
U5: library part CMP-0187-00368-2, "1 MHz, Low-Power Operational Amplifier, 8-Pin SOIC, Extended Temperature", Code_IPC=SOIC127P600-8, Code_JEDEC=MS-012, ComponentLink1Description="Manufacturer URL", ComponentLink1URL=http://www.microchip.com/, ComponentLink2Description=Datasheet, ComponentLink2URL=http://ww1.microchip.com/downloads/en/DeviceDoc/21733j.pdf, ComponentLink3Description="Package Specification", ComponentLink3URL=http://www.microchip.com/stellent/groups/techpub_sg/documents/packagingspec/en012702.pdf, DatasheetVersion="revJ, Nov-2009", PackageDescription="8-Lead Plastic Small Outline (SN) - Narrow, 3.90mm Body [SOIC]", PackageReference=SOIC-SN8, PackageVersion="revBB, Aug-2009", RevisionNote="URLs added."
U6: library part CMP-0859-00123-4, "IC BUF NON-INVERT 5.5V SOT23-5", Case/Package=SOT-23-5, High Level Output Current=-8mA, Low Level Output Current=8mA, Max Operating Temperature=125°C, Max Supply Voltage=5.5V, Min Operating Temperature=-40°C, Min Supply Voltage=1.6V, Package Quantity=3000, Quiescent Current=1uA, Lead Free="Lead Free", Logic Function=Buffer, Mount="Surface Mount", Number of Bits=1, Number of Bits per Element=1, Number of Channels=1, Number of Elements=1, Number of Input Lines=1, Number of Inputs=1, Number of Output Lines=1, Number Of Outputs=1, Number of Pins=5, Operating Supply Current=8mA, Packaging="Tape and Reel", Polarity=Non-Inverting, Propagation Delay=15.5ns, Radiation Hardening=No, REACH SVHC="No SVHC", Weight=0.000353oz

## Free pads (board coordinates)
  round 322.83 hole 244.09: MNT(0,0) MNT(0,2800) MNT(4875,0) MNT(4875,2800)

## Via types
v1: diameter 25, hole 15, Top Layer to Bottom Layer, tented both sides, 148 vias
v2: diameter 23.62, hole 13.78, Top Layer to Bottom Layer, tented both sides, 12 vias
v3: diameter 47.24, hole 23.62, Top Layer to Bottom Layer, tented both sides, 11 vias

## Nets (pads, with @x,y where several pads share a name; then routed paths per layer and width w, separated by ;. In a path a pad name is that pad's centre, name@x,y a point inside that pad or via, vN(x,y) a via of type N, cw(c..) or ccw(c..) an arc to the next point about the centre after c; other vN are vias at no path point)
3V3: C5.1 C6.1 C9.1 C11.1 EXP1.1 LED12.2 P2.1 R6.2 R7.2 R8.2 R13.2 U3.2 U3.4 U4.3V3 U5.8 | length 8010.9
  Top Layer w10: v3(2810,2205) 2814.57,2209.57 R13.2
  Top Layer w15: C9.1 2455.16,2109.84 2498.83,2066.17 2498.83,2036.17 v3(2505,2030) ; U3.4 2590.41,467.89 2590.41,605.41 v3(2725,740) ; U5.8 3710,2335 ; C11.1 3710,2095 ; v3(3710,2035) 3710,2095 ; R7.2 3915,2428.82 3915,2500 ; R8.2 4200,2426.18 4200,2470 4170,2500 3915,2500 ; 3710,2095 3710,2335 ; 3710,2335 3710,2412.5 3797.5,2500 3915,2500
  Bottom Layer w10: P2.1 839.53,585 1795,585 v3(1900,690) ; 2810,1975 v3(2810,2205)
  Bottom Layer w15: EXP1.1 2250,2435 2250,2040 2315,1975 2505,1975 ; v3(2505,2030) 2505,1975 ; v3(2725,740) 2860,875 2860,1630 2960,1730 3260,1730 3570,1730 3710,1870 3710,1980 ; v3(3710,2035) 3710,1980 ; 2505,1975 2810,1975 3705,1975 3710,1980
5V: C2.1 C3.1 LED1.2 LED2.1 LED3.1 LED4.1 LED5.1 LED6.1 LED7.1 LED8.1 LED9.1 LED10.1 LED11.1 U1.Vin U2.3 U6.5 | length 13841.9
  Top Layer w10: LED2.1 LED2.1 2015.04,1555.04 2066.67,1606.67 U6.5
  Top Layer w20: LED6.1 341.87,2405 405,2405 442.5,2442.5 ; LED4.1 430.86,319.14 405,345 405,415 365,455 ; LED7.1 542.42,2607.42 480,2545 480,2480 442.5,2442.5 ; v3(1345,750) 925,750 720,545 455,545 365,455 ; v3(1905,920) 1905,1260 1940,1295 1970,1295 ; LED2.1 2015,1395 1970,1350 1970,1295 ; LED3.1 2015,1123.58 2015,1195 1970,1240 1970,1295 ; U2.3 4045,485.83 ; C2.1 4045,244.57 4045,485.83 ; C3.1 4125,485.83 ; LED1.2 4250,588.5 4250,485.83 ; LED11.1 4305.86,215.86 4355,265 4355,320 4405,370 ; LED8.1 4433.12,2471.88 4460,2445 4460,2385 4500,2345 ; LED10.1@4545.86,455.86 4510,420 4455,420 4405,370 ; U1.Vin 4660,920 4707.5,872.5 ; 365,455 310,510 248.74,510 LED5.1 130,628.74 130,2065 477.5,2412.5 ; 442.5,2442.5 447.5,2442.5 477.5,2412.5 ; 477.5,2412.5 710,2645 775,2645 4090,2645 4410,2325 4480,2325 4500,2345 ; 4045,485.83 4125,485.83 ; 4125,485.83 4250,485.83 ; 4250,485.83 4320.83,485.83 4355,520 ; 4355,520 4707.5,872.5 ; 4355,520 4380,495 4380,395 4405,370 ; 4500,2345 4540,2305 4605,2305 4666.31,2243.69 LED9.1 4755,2149.85 4755,920 4707.5,872.5
  Bottom Layer w20: v3(1345,750) 1348.62,753.62 1738.62,753.62 v3(1905,920)
GND: AMP1.2 C1.2 C2.2 C3.2 C4.2 C5.2 C6.2 C8.2 C9.2 C10.2 C11.2 C13.1 GTR1.2 J1.2 J1.3 LED2.3 LED3.3 LED4.3 LED5.3 LED6.3 LED7.3 LED8.3 LED9.3 LED10.3 LED11.3 P1.2 P2.4 P2.6 P2.8 P2.10 P2.12 P2.14 P2.16 P2.18 P2.20 P2.MH1 P2.MH2 R1.1 R2.1 R3.1 R4.1 R5.1 R9.1 R10.1 R11.1 R12.1 R16.1 SW1.1 SW1.2 SW1.5 SW2.1 SW2.2 SW2.5 SW3.1 SW3.2 SW3.5 U1.GND1 U1.GND2 U1.GND3 U2.2 U2.4 U3.1 U4.GND-1 U4.GND-2 U4.GND-3 U5.4 U6.3
  other v1: 260,125 760,125 1010,125 1260,125 1510,125 1760,125 2010,125 2260,125 2760,125 3010,125 3260,125 3760,125 3865,125 4010,125 4260,125 4510,125 430,135 4690,175 4490,210 2910,215 3765,240 90.93,255.72 3000,285 1965,345 2155,370 3970,370 510,375 760,375 1010,375 3510,375 3740,375 4260,375 4760,375 195,380 2130,440 4730,455 4460,505 1260,525 1540,525 3440,540 3615,540 3910,605 3205,615 4806.31,617.93 260,625 510,625 2760,625 1260,645 1540,645 4640,675 4125,720 780,740 4250,755 2460,760 4725,770 2050,780 3360,810 260,875 3510,875 3760,875 4260,875 4510,875 2240,915 1575,950 4530,950 4605,950 1135,990 510,1125 1010,1125 2260,1125 2807.55,1167.13 2915,1170 2085,1215 780,1240 4675,1255 560,1285 1425,1295 2080,1540 4675,1560 1010,1625 1260,1625 1510,1625 2260,1625 2920,1630 2805,1635 880,1760 2250,1770 1980,1795 1460,1835 4205,1835 4310,1845 4410,1845 4510,1845 4630,1850 4695,1850 260,1875 510,1875 4010,1875 4205,1935 3090,2010 3270,2015 4660,2015 540,2030 3540,2030 1010,2125 1260,2125 1510,2125 4130,2130 4210,2130 3400,2135 3875,2135 4630,2165 3305,2185 4022.26,2185.85 3800,2195 2420,2245 2540,2245 3075,2255 480,2260 2810,2285 1880,2300 2069.38,2303.67 4330,2310 4025,2315 2855,2345 3875,2350 1010,2375 1260,2375 1510,2375 130,2380 3320,2380 3595,2400 4670,2415 4145,2425 2290.94,2441.42 4000,2450 105,2520 3605,2545 3030,2560 3295,2565 3975,2570 365,2610 260,2625 4685,2625 4440,2650 2495,2735 4090,2735 1045,2740
NetAMP1_1: AMP1.1 C12.1 GTR1.1 | length 1197.9
  Top Layer w5: GTR1.1 2360,2485 2390,2455 2520,2455 ; AMP1.1 2660,2485 2630,2455 2520,2455 ; C12.1 3080,2220 3020,2160 2745,2160 2520,2385 2520,2455
NetC1_1: C1.1 C4.1 J1.1 U2.1 U3.3 | length 1318.1
  Top Layer w10: 3017.36,485 3017.36,701.93 C4.1 ; 3390,480.63 3390.43,481.06 ; C1.1 3534.57,481.06 3535,480.63
  Top Layer w15: U3.3 3017.36,485 3125.63,485 J1.1 3390,480.63 3535,480.63 ; 3534.57,481.06 3759.69,481.06 U2.1
NetC7_1: C7.1 POT1.1 POT1.2 R15.1 U5.2 | length 1418.2
  Top Layer w5: POT1.1 2691.38,2320 ; POT1.2 2691.38,2320 ; R15.1 3475,2584.37 3475,2339.53 3492.26,2322.26 ; C7.1 3504.53,2334.53 3492.26,2322.26 ; 2691.38,2320 2761.38,2390 3225,2390 3330,2285 U5.2 3455,2285 3480,2310 3492.26,2322.26
NetC7_2: C7.2 R15.2 R17.1 U5.1 | length 537.8
  Top Layer w5: R17.1 3225,2465 3255,2435 3365,2435 ; R15.2 3395.63,2540.63 3365,2510 3365,2435 ; U5.1 3400,2336.46 3400,2435 ; C7.2 3400,2435 ; 3365,2435 3400,2435
NetC8_1: C8.1 R14.1 | length 203.6
  Top Layer w5: R14.1 2795,2060 2805,2070 C8.1
NetC12_2: C12.2 R18.2 U5.3 | length 359
  Top Layer w5: C12.2 3184.45,2220.39 3184.45,2282.7 ; R18.2 3184.45,2282.7 ; U5.3 3280,2235 3232.3,2282.7 3184.45,2282.7
NetC13_2: C13.2 R17.2 U1.24 | length 941.1
  Top Layer w5: C13.2 3030.33,2460 ; v2(3030,2425) 3030.33,2425.33 3030.33,2460 ; R17.2 3101.61,2460 3030.33,2460 ; U1.24 v2(3160,1999.31)
  Bottom Layer w5: v2(3030,2425) 3030,2125 3155.69,1999.31 v2(3160,1999.31)
NetDS1_1: DS1.1 U1.0 | length 311.8
  Top Layer w10: DS1.1 4535,1950 4560,1925 U1.0
NetDS1_2: DS1.2 R3.2 | length 70.9
  Top Layer w10: DS1.2 R3.2
NetDS2_1: DS2.1 U1.1 | length 301.5
  Top Layer w10: U1.1 DS2.1
NetDS2_2: DS2.2 R4.2 | length 70.9
  Top Layer w10: DS2.2 R4.2
NetDS3_1: DS3.1 U1.2 | length 311.8
  Top Layer w10: U1.2 4360,1930 4385,1955 DS3.1
NetDS3_2: DS3.2 R5.2 | length 70.9
  Top Layer w10: DS3.2 R5.2
NetDS4_1: DS4.1 U4.25 | length 599.6
  Top Layer w10: U4.25 1825,1485 1875,1535 1875,1910 1905,1940 DS4.1
NetDS4_2: DS4.2 R9.2 | length 140.9
  Top Layer w10: DS4.2 R9.2
NetDS5_1: DS5.1 U4.26 | length 639.6
  Top Layer w10: U4.26 1825,1585 1860,1620 1860,2035 1905,2080 DS5.1
NetDS5_2: DS5.2 R10.2 | length 140.9
  Top Layer w10: DS5.2 R10.2
NetDS6_1: DS6.1 U4.27 | length 664.6
  Top Layer w10: U4.27 1825,1685 1845,1705 1845,2145 1905,2205 DS6.1
NetDS6_2: DS6.2 R11.2 | length 140.9
  Top Layer w10: DS6.2 R11.2
NetEXP1_2: EXP1.2 R2.2 U1.25 | length 1786.6
  Top Layer w5: R2.2 1938.82,2525 1999.41,2525 ; EXP1.2 1999.41,2525 ; U1.25 3060,1875 2930,2005 2600,2005 2390,2215 2337.5,2215 2225,2327.5 2225,2550 2200,2575 2035,2575 1999.41,2539.41 1999.41,2525
NetLED1_1: LED1.1 R1.2 | length 71.1
  Top Layer w10: R1.2 4311.5,659.02 LED1.1
  Top Layer w15: R1.2 R1.2@4311,660.49
NetLED2_2: LED2.2 LED3.4 | length 229.9
  Top Layer w10: LED3.4 LED3.4 2015,1355 2040,1380 2115,1380 2144.96,1409.96 LED2.2
NetLED2_4: LED2.4 U6.4 | length 219.1
  Top Layer w10: LED2.4 2015.04,1806.54 2020.9,1812.4 U6.4
NetLED3_2: LED3.2 LED4.4 | length 2141
  Top Layer w10: LED4.4 520,231.87 520,300 935,715 v3(1435,715) ; v3(1990,905) 2144.96,1059.96 LED3.2
  Bottom Layer w10: v3(1435,715) 1800,715 v3(1990,905)
NetLED4_2: LED4.2 LED5.4 | length 239.3
  Top Layer w10: LED5.4 334.54,425.46 360,400 360,355 315,310 315,255 340.86,229.14 LED4.2
NetLED5_2: LED5.2 LED6.4 | length 1825.8
  Top Layer w10: LED5.2 75,500 75,2138.13 LED6.4
NetLED6_2: LED6.2 LED7.4 | length 226.1
  Top Layer w10: LED6.2 224.14,2469.14 250,2495 295,2495 345,2445 380,2445 406.01,2471.01 LED7.4
NetLED7_2: LED7.2 LED8.4 | length 3883.8
  Top Layer w10: LED7.2 475.05,2675 4229.85,2675 LED8.4
NetLED8_2: LED8.2 LED9.4 | length 233.2
  Top Layer w10: LED8.2 4526.25,2563.75 4550,2540 4550,2495 4500,2445 4500,2405 4529.9,2375.1 LED9.4
NetLED9_2: LED9.2 LED10.4 | length 1794.1
  Top Layer w10: LED10.4 4790,701.87 4790,2298.58 LED9.2
NetLED10_2: LED10.2 LED11.4 | length 252.1
  Top Layer w10: LED11.4 4444.14,349.14 4485,390 4515,390 4575,330 4600,330 4635.86,365.86 LED10.2
NetLED12_1: LED12.1 R12.2 | length 120.4
  Top Layer w10: R12.2 2155.98,258.5 LED12.1
NetPOT1_3: POT1.3 R14.2 | length 110.1
  Top Layer w5: POT1.3 2641.38,2060.24 R14.2
NetR6_1: R6.1 SW1.3 SW1.4 U4.17 | length 2892.3
  Top Layer w5: U4.17 780,1685 v2(795,1670) ; v2(885,615) 1125,375 2043.74,375 ; SW1.4 2077.87,507.87 2095,525 2095,621.18 R6.1
  Top Layer w10: SW1.3 2043.74,375 SW1.4
  Bottom Layer w5: v2(795,1670) 815,1650 815,685 v2(885,615)
NetR7_1: R7.1 SW2.3 SW2.4 U1.4 | length 944.1
  Top Layer w10: R7.1 3798.82,2413.11 3814.65,2397.28 3862.72,2397.28 3912.99,2347.01 3931.18,2347.01 3953.74,2324.45 SW2.4 SW2.3 3953.74,1956.26 3970,1940 4065,1940 4160,1845 U1.4
NetR8_1: R8.1 SW3.3 SW3.4 U1.3 | length 816.1
  Top Layer w10: R8.1@4091.26,2422.56 R8.1 4088.82,2413.11 4104.65,2397.28 4140.28,2397.28 4190.55,2347.01 4226.18,2347.01 4248.74,2324.45 SW3.4 SW3.3 4260,2020.87 U1.3
NetU1_9: U1.9 U4.33 | length 2522.5
  Top Layer w5: v2(1630,1415) 1653.85,1415 1683.85,1385 U4.33 ; v2(3610,1885) 3660,1835 U1.9
  Bottom Layer w5: v2(1630,1415) 1740,1415 2270,1945 3550,1945 v2(3610,1885)
NetU1_10: U1.10 U4.22 | length 3430.1
  Top Layer w5: U4.22 v2(845,885) ; v2(3500,1885) 3560,1825 U1.10
  Bottom Layer w5: v2(845,885) 1249.14,885 2268.45,1904.31 3480.69,1904.31 v2(3500,1885)
NetU1_11: U1.11 U4.23 | length 3365.5
  Top Layer w5: U4.23 687.5,782.5 852.5,782.5 v2(855,780) ; v2(3410,1885) 3459.79,1835.21 3459.79,1725.21 U1.11
  Bottom Layer w5: v2(855,780) 1160,780 2265,1885 v2(3410,1885)
NetU1_12: U1.12 U4.19 | length 3084
  Top Layer w5: U4.19 v2(845,1385) ; v2(3335,1925) 3360,1900 U1.12
  Bottom Layer w5: v2(845,1385) 1735,1385 2275,1925 v2(3335,1925)
NetU1_13: U1.13 U4.18 | length 3113.9
  Top Layer w5: U4.18 900,1485 1550,835 3240,835 3360,955 U1.13
NetU1_32: U1.32 U6.2 | length 227.4
  Top Layer w10: U6.2 2155.24,1773.08 2186.92,1773.08 2235,1725 U1.32
RST: P2.15 U4.EN | length 2065.5
  Top Layer w5: P2.15 360,1526.97 360,980 505,835 870,835 920,785 U4.EN
SCL: P1.3 U1.19 | length 1063
  Top Layer w10: v3(3960,805) U1.19
  Bottom Layer w10: P1.3 3960,522.91 v3(3960,805)
SDA: P1.1 U1.18 | length 1086.8
  Top Layer w10: v3(3860,805) U1.18
  Bottom Layer w10: P1.1 3860,580.39 v3(3860,805)
TCK: P2.9 U4.16 | length 618.8
  Top Layer w5: P2.9 460,1390.75 460,1650 595,1785 U4.16
TDI: P2.5 U4.12 | length 1879.1
  Top Layer w5: P2.5@405,1177.64 P2.5 370.3,1211.71 370.3,1270.49 394.8,1295 420,1295 470,1345 470,1605 600,1735 755,1735 905,1885 U4.12
TDO: P2.13 U4.15 | length 861.4
  Top Layer w5: P2.13 449.29,1537.52 449.29,2039.29 595,2185 U4.15
TMS: P2.7 U4.14 | length 1628.7
  Top Layer w5: P2.7 480,1332.01 480,1467.07 547.93,1535 780,1535 1030,1785 U4.14
V_MID: C10.1 R13.1 R16.2 R18.1 | length 798.9
  Top Layer w5: R13.1 2927.5,2280.43 ; R16.2 2927.5,2280.43 ; R18.1 3040.28,2345 ; C10.1 3195,2070 3155,2110 3155,2260 3130,2285 3085,2285 3040.28,2329.72 3040.28,2345 ; 2927.5,2280.43 2927.5,2307.5 2965,2345 3040.28,2345
pads on no net: LED11.2 P2.2 P2.3 P2.11 P2.17 P2.19 U1.3.3-1 U1.3.3-2 U1.5 U1.6 U1.7 U1.8 U1.14 U1.15 U1.16 U1.17 U1.20 U1.21 U1.22 U1.23 U1.26 U1.27 U1.28 U1.29 U1.30 U1.31 U1.33 U1.34 U1.35 U1.36 U1.37 U1.38 U1.39 U1.40 U1.41 U4.0 U4.2 U4.4 U4.5 U4.5V U4.13 U4.21 U4.32 U4.34 U4.35 U4.CLK U4.CMD U4.D0 U4.D1 U4.D2 U4.D3 U4.RX U4.TX U4.VN U4.VP U5.5 U5.6 U5.7 U6.1

## Polygon pours and split planes (outlines as drawn)
GND on Top Layer "GND_L01_P008" (solid, remove dead copper, pour order 8): -101.53,228.45 ccw(c0,0) 228.45,-101.53 cw(c374.49,-154.04) 374.49,1.15 4500.51,1.15 cw(c4500.51,-154.04) 4646.55,-101.53 ccw(c4875,0) 4976.53,228.45 cw(c5029.04,374.49) 4873.85,374.49 4873.85,2425.51 cw(c5029.04,2425.51) 4976.53,2571.55 ccw(c4875,2800) 4646.55,2901.53 cw(c4500.51,2954.04) 4500.51,2798.85 374.49,2798.85 cw(c374.49,2954.04) 228.45,2901.53 ccw(c0,2800) -101.53,2571.55 cw(c-154.04,2425.51) 1.15,2425.51 1.15,374.49 cw(c-154.04,374.49)
3V3 on Top Layer "NONET_L-01_P-001" (solid, pour order 5): 2225,365 2225,325 2255,295 2295,295 2355,235 2355,175 2655,175 2835,355 2975,355 2975,415 2835,415 2555,695 2175,695 2145,725 1645,725 1645,645 1885,645 1945,585 2005,585 2045,625 2045,655 2065,675 2075,675 2115,675 2125,665 2125,565 2225,465
GND on Bottom Layer "GND_L02_P009" (solid, remove dead copper, pour order 9): -101.53,228.45 ccw(c0,0) 228.45,-101.53 cw(c374.49,-154.04) 374.49,1.15 4500.51,1.15 cw(c4500.51,-154.04) 4646.55,-101.53 ccw(c4875,0) 4976.53,228.45 cw(c5029.04,374.49) 4873.85,374.49 4873.85,2425.51 cw(c5029.04,2425.51) 4976.53,2571.55 ccw(c4875,2800) 4646.55,2901.53 cw(c4500.51,2954.04) 4500.51,2798.85 374.49,2798.85 cw(c374.49,2954.04) 228.45,2901.53 ccw(c0,2800) -101.53,2571.55 cw(c-154.04,2425.51) 1.15,2425.51 1.15,374.49 cw(c-154.04,374.49)

## Keep-outs
Keep-Out Layer:
  the board outline again, w10

## Silkscreen, mask and mechanical layers (free items; w line width, h text height)
Bottom Overlay:
  drawing of 5 lines, arcs and shapes, not listed
  text "Amped Up!" at 1921.46,954.07 h250
  text "Main Board Rev. 1" at 1912.66,561.97 h150
  text "Chris Caron & Remy Yoo" at 2110.38,472.52 h150
  text "Team 4 - SDP21" at 1698.08,324.66 h100
Mechanical 1:
  lines w10: -101.53,228.45 ccw(c-154.04,374.49) 1.15,374.49 1.15,2425.51 ccw(c-154.04,2425.51) -101.53,2571.55 cw(c0,2800) 228.45,2901.53 ccw(c374.49,2954.04) 374.49,2798.85 4500.51,2798.85 ccw(c4500.51,2954.04) 4646.55,2901.53 cw(c4875,2800) 4976.53,2571.55 ccw(c5029.04,2425.51) 4873.85,2425.51 4873.85,374.49 ccw(c5029.04,374.49) 4976.53,228.45 cw(c4875,0) 4646.55,-101.53 ccw(c4500.51,-154.04) 4500.51,1.15 374.49,1.15 ccw(c374.49,-154.04) 228.45,-101.53 cw(c0,0) -101.53,228.45 ; 2310,1245 ccw(c2380,1245) 2380,1175 2740,1175 ccw(c2740,1245) 2810,1245 2810,1555 ccw(c2740,1555) 2740,1625 2380,1625 ccw(c2380,1555) 2310,1555 2310,1245 ; 2910,1245 ccw(c2980,1245) 2980,1175 4540,1175 ccw(c4540,1245) 4610,1245 4610,1555 ccw(c4540,1555) 4540,1625 2980,1625 ccw(c2980,1555) 2910,1555 2910,1245

## Text inside footprints (layer, text, board x,y; h text height)
U1: Top Overlay "Vin" at 4630.05,946.86 h118.11 r270; Top Overlay "G" at 4530.05,930.55 h118.11 r270; Top Overlay "3V3" at 4430.05,960.25 h118.11 r270; Top Overlay "23" at 4330.05,953.06 h118.11 r270; Top Overlay "22" at 4229.56,952.96 h118.11 r270; Top Overlay "21" at 4129.56,947.44 h118.11 r270; Top Overlay "20" at 4030.05,953.06 h118.11 r270; Top Overlay "19" at 3930.05,950.61 h118.11 r270; Top Overlay "18" at 3830.05,950.71 h118.11 r270; Top Overlay "17" at 3729.56,950.66 h118.11 r270; Top Overlay "16" at 3630.05,950.93 h118.11 r270; Top Overlay "15" at 3530.05,950.77 h118.11 r270; Top Overlay "14" at 3429.56,951.59 h118.11 r270; Top Overlay "13" at 3330.05,950.71 h118.11 r270; Top Overlay "G" at 3230.05,930.55 h118.11 r270; Top Overlay "41" at 3129.56,947.65 h118.11 r270; Top Overlay "40" at 3030.05,953.28 h118.11 r270; Top Overlay "39" at 2930.05,952.57 h118.11 r270; Top Overlay "38" at 2830.05,952.68 h118.11 r270; Top Overlay "37" at 2730.05,952.63 h118.11 r270; Top Overlay "36" at 2630.05,952.9 h118.11 r270; Top Overlay "35" at 2530.05,952.74 h118.11 r270; Top Overlay "34" at 2430.05,953.56 h118.11 r270; Top Overlay "33" at 2330.05,952.68 h118.11 r270; Top Overlay "G" at 4630.05,1930.55 h118.11 r270; Top Overlay "0" at 4530.05,1924.54 h118.11 r270; Top Overlay "1" at 4429.56,1917.16 h118.11 r270; Top Overlay "2" at 4329.56,1925.03 h118.11 r270; Top Overlay "3" at 4230.05,1924.76 h118.11 r270; Top Overlay "4" at 4129.56,1926.23 h118.11 r270; Top Overlay "5" at 4030.54,1924.92 h118.11 r270; Top Overlay "6" at 3930.05,1924.7 h118.11 r270; Top Overlay "7" at 3830.05,1924.32 h118.11 r270; Top Overlay "8" at 3730.05,1924.54 h118.11 r270; Top Overlay "9" at 3630.05,1924.65 h118.11 r270; Top Overlay "10" at 3530.05,1950.71 h118.11 r270; Top Overlay "11" at 3429.56,1945.09 h118.11 r270; Top Overlay "12" at 3329.56,1950.61 h118.11 r270; Top Overlay "3V3" at 3230.05,2010.25 h118.11 r270; Top Overlay "24" at 3129.56,1953.94 h118.11 r270; Top Overlay "25" at 3030.05,1953.12 h118.11 r270; Top Overlay "26" at 2930.05,1953.28 h118.11 r270; Top Overlay "27" at 2829.56,1953.01 h118.11 r270; Top Overlay "28" at 2730.05,1953.06 h118.11 r270; Top Overlay "29" at 2630.05,1952.95 h118.11 r270; Top Overlay "30" at 2530.05,1952.68 h118.11 r270; Top Overlay "31" at 2430.05,1947.05 h118.11 r270; Top Overlay "32" at 2330.05,1952.57 h118.11 r270